# Altium PCB FVA-NET.PcbDoc
Units mm, origin at the board's own origin, x right, y up, seen from the top; angles counter-clockwise.
Board outline 40 x 50 mm, 2 copper layers (Top Layer, Bottom Layer); 36 components, 28 nets, 141 pads, 82 vias.
Unrouted connection lines stored in the file: 1.
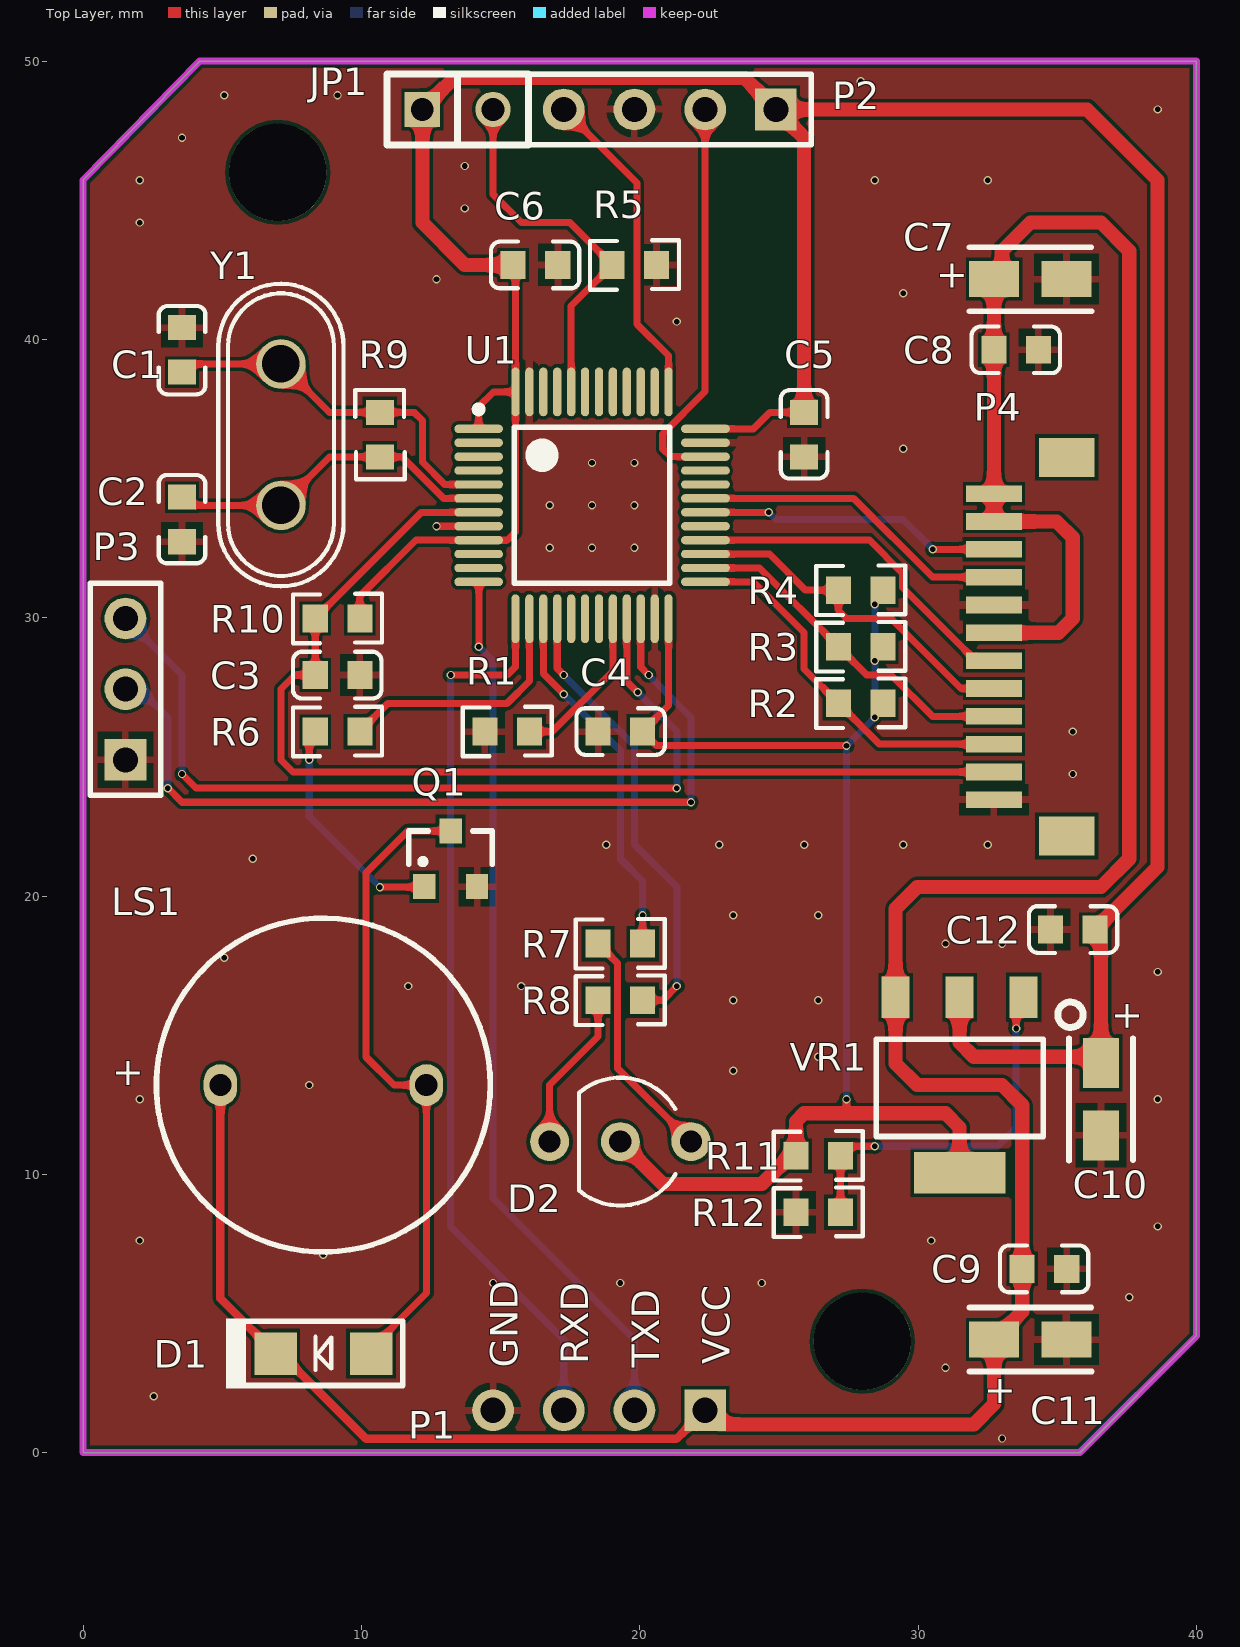
[diagram p0: Top Layer view]
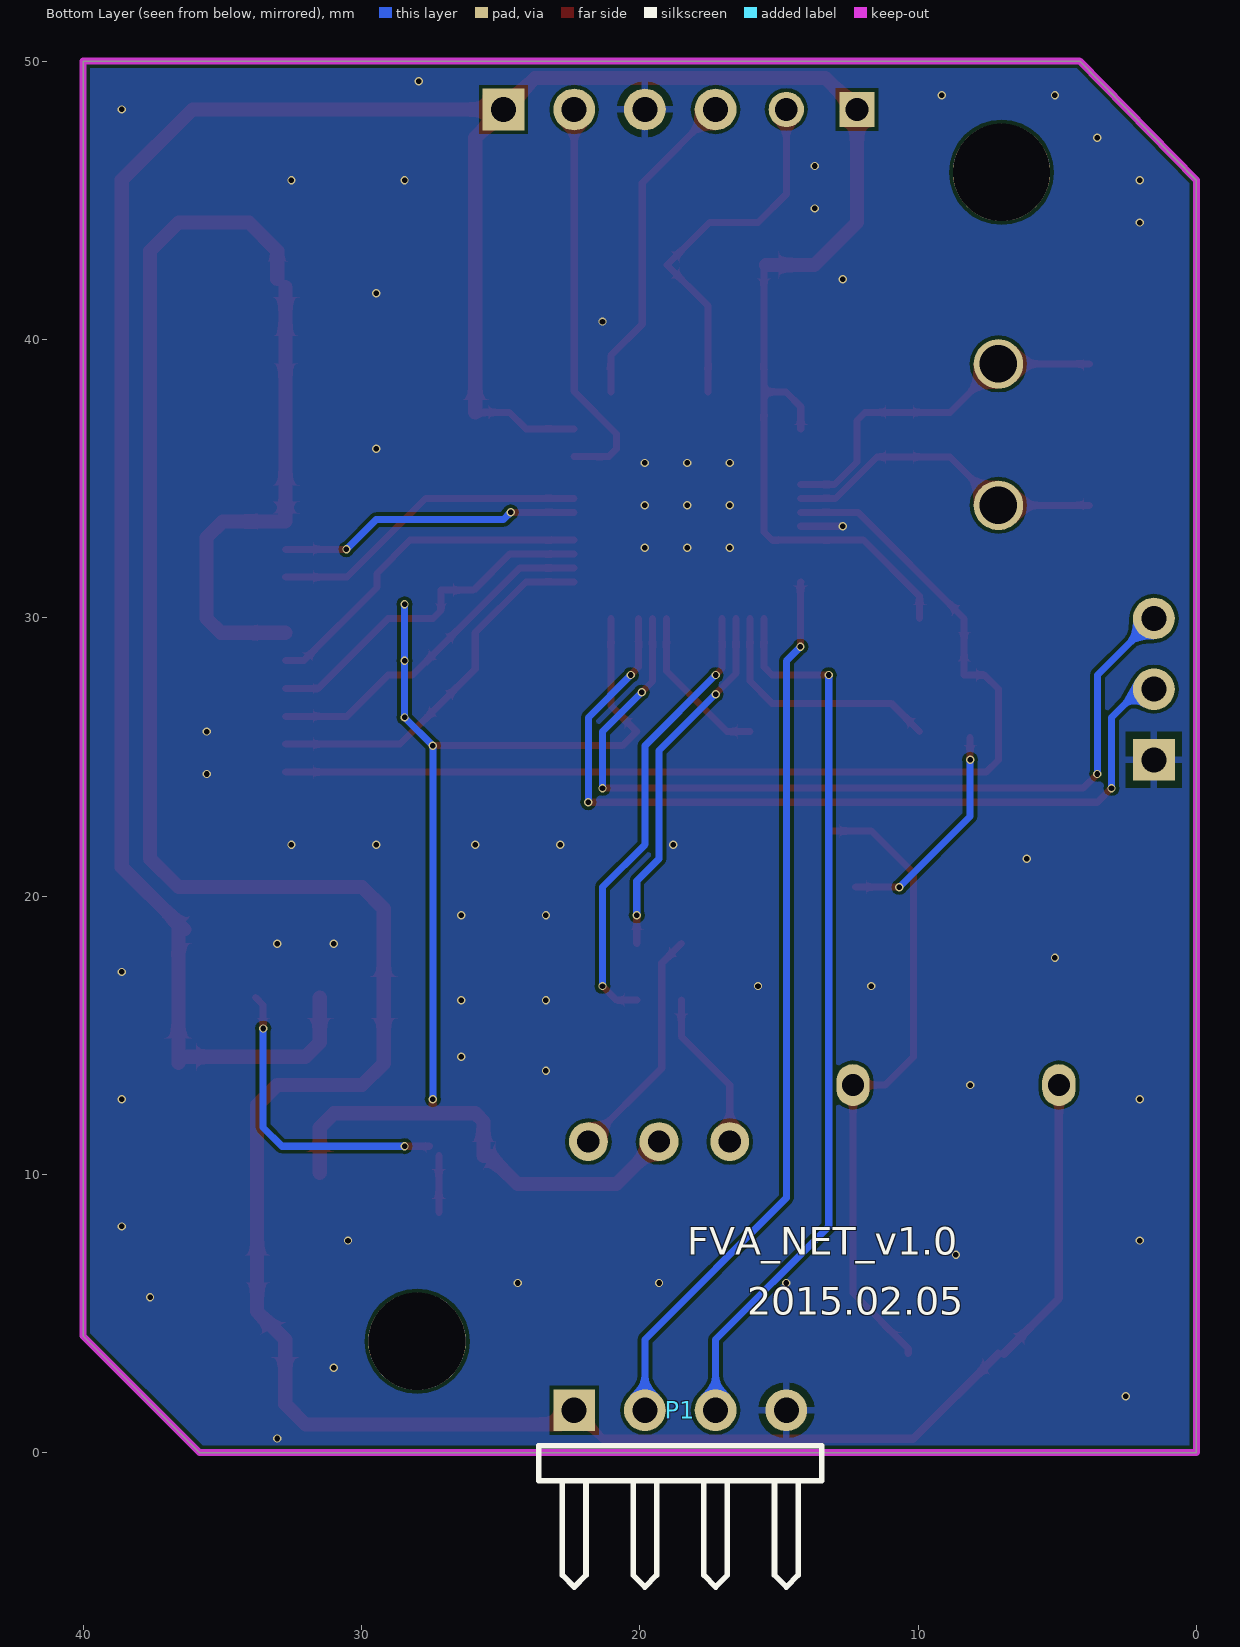
[diagram p1: Bottom Layer view, seen from below]
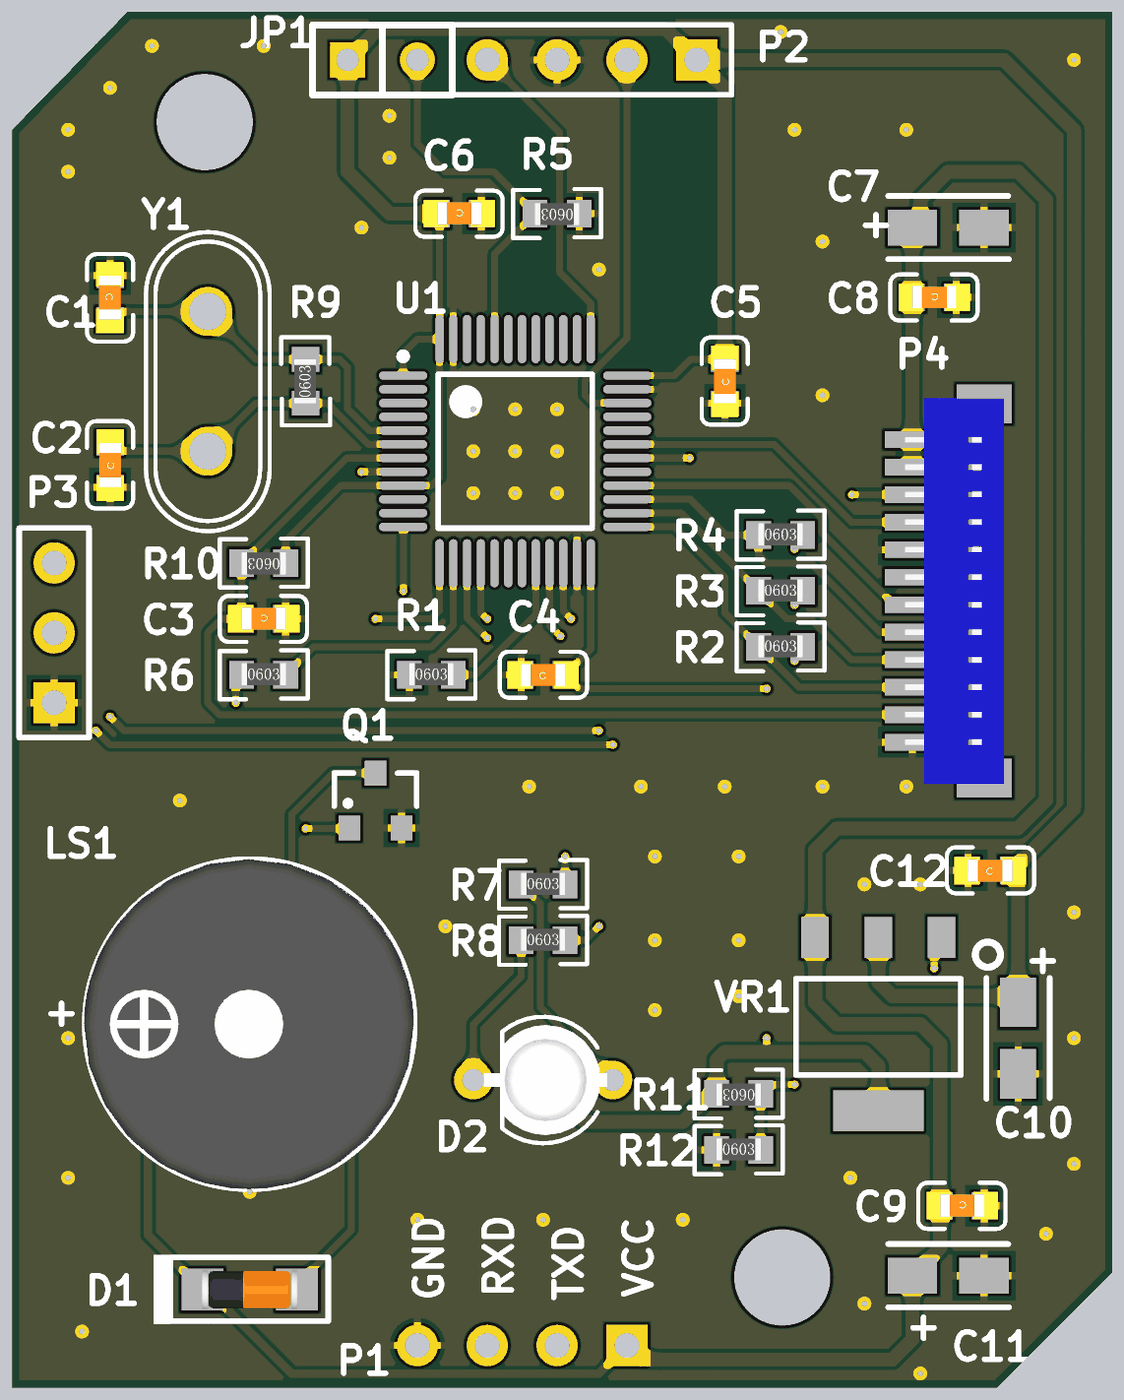
[diagram p2: 3D render of the assembled board from above, using the file's embedded part models]

## Layer stack, top to bottom
Top Solder: solder mask 0.0102, Solder Resist, Dk 3.5
Top Layer: signal copper 0.0356
Dielectric1: dielectric 0.32, FR-4, Dk 4.8
Bottom Layer: signal copper 0.0356
Bottom Solder: solder mask 0.0102, Solder Resist, Dk 3.5

## Board outline
0,0 0,45.72 4.191,50 40,50 40,4.186 35.814,0

## Design rules (kind name [scope] priority, off if disabled: settings)
Clearance [All] p1: gap=0.127
ComponentClearance [All] p1: gap=0 collisioncheckmode=3 verticalgap=0 showdistances=FALSE
FabricationTestPointUsage TestPointUsage [All] p1: valid=0 allowmultiple=FALSE
FabricationTestpoint Testpoint [(IsPad And (OnTopLayer Or OnBottomLayer))] p1: side=3 testpointundercomponent=TRUE minsize=1.016 maxsize=2.54 preferedsize=1.524 minholesize=0 maxholesize=1.016 preferedholesize=0.813 testpointgrid=0.025 allowsidetop=TRUE allowsidebottom=TRUE usegrid=TRUE gridtolerance=0
MinimumSolderMaskSliver [All] p1: minsoldermaskwidth=0
PolygonConnect [All] p1: connectstyle=Relief reliefconductorwidth=0.254 reliefentries=4 polygonreliefangle="90 Angle" airgapwidth=0.254
RoutingVias [All] p1: holewidth=0.3 width=0.6 viastyle="Through Hole" minholewidth=0.3 minwidth=0.6 maxholewidth=0.3 maxwidth=0.6
SilkToSilkClearance [All] p1: silktosilkclearance=0
SilkToSolderMaskClearance SilkscreenOverComponentPads [IsPad] p1: minsilkscreentomaskgap=0 clearancetoexposedcopper=TRUE
SolderMaskExpansion [All] p1: expansion=0.102
UnpouredPolygon [All] p1: allowunpoured=FALSE
Width Width_1 [(InNet('+3.3V') OR InNet('+5V'))] p1: maxlimit=0.508 minlimit=0.254 preferedwidth=0.508
Width [All] p2: maxlimit=0.254 minlimit=0.254 preferedwidth=0.254
23 further rules are at their usual default settings.

## Components (designator, comment, footprint, x,y, rotation, side; value= is the part's Value field where it differs from the comment)
C1 "Cap" c0603 3.556,39.624 r270 top
C2 "Cap" c0603 3.556,33.528 r90 top
C3 "Cap" c0603 9.144,27.94 r180 top
C4 "Cap" c0603 19.304,25.908 r0 top
C5 "Cap" c0603 25.908,36.576 r90 top
C6 "Cap" c0603 16.256,42.672 r180 top
C7 "CAP+" T3216 34.036,42.164 r0 top
C8 "CAP" C0603 33.528,39.624 r180 top
C9 "cap" C0603 34.544,6.604 r180 top
C10 "Cap Pol1" T3216 36.576,12.7 r270 top
C11 "CAP+" T3216 34.036,4.064 r0 top
C12 "cap" C0603 35.56,18.796 r0 top
D1 "1N4148" D1206 8.636,3.556 r180 top
D2 "LED_R&G_1" LED_R&G 19.304,11.176 r180 top
JP1 "JP" SIP2 12.192,48.26 r0 top
LS1 "Speaker" BUZZER 8.636,13.208 r0 top
P1 "Header 4H" HDR1X4H 22.352,1.524 r180 bottom locked
P2 "SWD" HDR1X4 24.892,48.26 r180 top
P3 "Header 3" HDR1X3 1.524,24.892 r90 top
P4 "JST" "JST BM12B-SRSS-TB" 34.036,28.956 r270 top locked (schematic designator P2)
Q1 "NPN" SOT23/BEC 13.208,21.336 r0 top
R1 "RES" R0603 15.24,25.908 r0 top
R2 "RES" R0603 27.94,26.924 r0 top
R3 "RES" R0603 27.94,28.956 r0 top
R4 "RES" R0603 27.94,30.988 r0 top
R5 "RES" R0603 19.812,42.672 r180 top
R6 "RES" R0603 9.144,25.908 r0 top
R7 "RES" R0603 19.304,18.288 r0 top
R8 "RES" R0603 19.304,16.256 r0 top
R9 "RES" R0603 10.668,36.576 r90 top
R10 "RES" R0603 9.144,29.972 r180 top
R11 "RES" R0603 26.416,10.668 r180 top
R12 "RES" R0603 26.416,8.636 r0 top
U1 "STM32F103CBT6" LQFP48 18.288,34.036 r0 top
VR1 "LM317" SOT223 31.496,13.208 r180 top
Y1 "8MHz" XTAL-HC-49/U-S 7.112,34.036 r90 top

## Footprints (in the part's own frame and the unit in brackets; to place one, negate y for a bottom-side part, rotate by r counter-clockwise, add the part's x,y. Pads: shape width x height; smd on the part's side, far side on the other; paste and mask are expansions set on the pad)
BUZZER [mm]
  oval 1.2x1.5 hole 0.8: 1(-3.7,0) 2(3.7,0)
  silkscreen extent -6,-6 6,6, body extent -6.03,-6 5.97,6, height 9.3
c0603 [mm] "Chip Capacitor, 2-Leads, Body 1.6x0.8mm, IPC Medium Density"
  rect 0.9x1 smd: 1(-0.8,0) 2(0.8,0)
  silkscreen extent -1.57,-0.84 1.6,0.84, body extent -1.3,-0.51 1.3,0.49, height 0.89
C0603 [mm] "Chip Capacitor, 2-Leads, Body 1.6x0.8mm, IPC Medium Density"
  rect 0.9x1 smd: 1(-0.8,0) 2(0.8,0)
  silkscreen extent -1.57,-0.84 1.6,0.84, body extent -1.3,-0.51 1.3,0.49, height 0.89
D1206 [mil]
  rect 60x60 smd: 1(-67.5,0) 2(67.5,0)
  silkscreen extent -112,-50 138,49, body extent -69,-29 69,29, height 56
HDR1X3 [mm] "Connector; Header; 3 Position"
  rect 1.5x1.5 hole 0.9: 1(0,0)
  round 1.5 hole 0.9: 2(2.54,0) 3(5.08,0)
  silkscreen extent -1.27,-1.27 6.35,1.27
HDR1X4 [mm] "Connector; Header; 4 Position"
  rect 1.5x1.5 hole 0.9: 1(0,0)
  round 1.5 hole 0.9: 2(2.54,0) 3(5.08,0) 4(7.62,0)
  silkscreen extent -1.27,-1.27 8.89,1.27
HDR1X4H [mm] "Connector; Header; 4 Position; Right Angle"
  rect 1.5x1.5 hole 0.9: 1(0,0)
  round 1.5 hole 0.9: 2(2.54,0) 3(5.08,0) 4(7.62,0)
  silkscreen extent -1.27,-6.35 8.89,-1.27
"JST BM12B-SRSS-TB" [mm] "BM12B-SRSS-TB"
  rect 1.4x2 smd: 0(-6.8,1.308) 0(6.8,1.308)
  rect 0.6x2 smd: 1(-5.5,-1.308) 2(-4.5,-1.308) 3(-3.5,-1.308) 4(-2.5,-1.308) 5(-1.5,-1.308) 6(-0.5,-1.308) 7(0.5,-1.308) 8(1.5,-1.308) 9(2.5,-1.308) 10(3.5,-1.308) 11(4.5,-1.308) 12(5.5,-1.308)
  body extent -7,-1.57 7,2.03, height 4.25
LED_R&G [mm]
  round 1.4 hole 0.8: 1(-2.54,0) 2(0,0) 3(2.54,0)
  silkscreen extent -1.98,-2.3 1.49,2.3, body extent -2.34,-2 2.16,2, height 12.43
LQFP48 [mm] "TSQFP, 48-Leads, Body 9.2x9.2mm (max), Pitch 0.50mm, IPC Medium Density"
  oval 1.75x0.3 smd: 1(-4.075,2.75) 2(-4.075,2.25) 3(-4.075,1.75) 4(-4.075,1.25) 5(-4.075,0.75) 6(-4.075,0.25) 7(-4.075,-0.25) 8(-4.075,-0.75) 9(-4.075,-1.25) 10(-4.075,-1.75) 11(-4.075,-2.25) 12(-4.075,-2.75) 25(4.075,-2.75) 26(4.075,-2.25) 27(4.075,-1.75) 28(4.075,-1.25) 29(4.075,-0.75) 30(4.075,-0.25) 31(4.075,0.25) 32(4.075,0.75) 33(4.075,1.25) 34(4.075,1.75) 35(4.075,2.25) 36(4.075,2.75)
  oval 0.3x1.75 smd: 13(-2.75,-4.075) 14(-2.25,-4.075) 15(-1.75,-4.075) 16(-1.25,-4.075) 17(-0.75,-4.075) 18(-0.25,-4.075) 19(0.25,-4.075) 20(0.75,-4.075) 21(1.25,-4.075) 22(1.75,-4.075) 23(2.25,-4.075) 24(2.75,-4.075) 37(2.75,4.075) 38(2.25,4.075) 39(1.75,4.075) 40(1.25,4.075) 41(0.75,4.075) 42(0.25,4.075) 43(-0.25,4.075) 44(-0.75,4.075) 45(-1.25,4.075) 46(-1.75,4.075) 47(-2.25,4.075) 48(-2.75,4.075)
  silkscreen extent -4.2,-2.8 2.8,3.57, body extent -3.5,-3.5 3.5,3.5, height 1.6
R0603 [mm]
  rect 0.9x1 smd: 1(-0.8,0) 2(0.8,0)
  silkscreen extent -1.6,-0.89 1.6,0.89, body extent -0.8,-0.38 0.8,0.42, height 0.45
SIP2 [mil]
  rect 50x50 hole 32: 1(0,0)
  round 50 hole 32: 2(100,0)
  silkscreen extent -50,-50 150,50
SOT23/BEC [mm]
  rect 0.8x0.9 smd: B(-0.95,-1) C(0,1) E(0.95,-1)
  silkscreen extent -1.5,-0.2 1.5,1
SOT223 [mm]
  rect 1x1.5 smd: 1(-2.3,-3.15) 2(0,-3.15) 3(2.3,-3.15)
  rect 3.28x1.5 smd: 2(0,3.15)
  silkscreen extent -4.44,-2.98 3,1.85
T3216 [mm] "Molded Capacitor, 2-Leads, Body 3.2x1.6mm, IPC Medium Density"
  rect 1.8x1.3 smd: 1(-1.3,0) 2(1.3,0)
  silkscreen extent -2.18,-1.15 2.21,1.15
XTAL-HC-49/U-S [mil]
  round 70 hole 53: 1(200,0) 2(0,0)
  silkscreen extent -115,-89 314,89

## Part data
C1 C2 C3 C4 C5 C6: "电容器 Capacitor"
C8 C9 C12: "Capacitor"
C10: "Polarized Capacitor (Radial)"
D1: library part "Diode 1N4148", "High Conductance Fast Diode"
JP1: library part JP2
LS1: "Loudspeaker"
P1: "Header, 4-Pin, Right Angle"
P2: library part "Header 4", "Header, 4-Pin"
P3: "Header, 3-Pin"
P4: library part "Header 12", "Header, 12-Pin"
Q1: "NPN Transistor"
U1: library part STM32F103x6x8xB, "48 pin"
VR1: library part "Volt Reg", "Voltage Regulator"
Y1: library part XTAL, "Crystal Oscillator"

## Free pads (board coordinates)
  round 3.5 hole 3.5 unplated: 0(7,46) 1(28,4)

## Via types
v1: diameter 0.3, hole 0.2, Top Layer to Bottom Layer, 82 vias

## Nets (pads, with @x,y where several pads share a name; then routed paths per layer and width w, separated by ;. In a path a pad name is that pad's centre, name@x,y a point inside that pad or via, vN(x,y) a via of type N, cw(c..) or ccw(c..) an arc to the next point about the centre after c; other vN are vias at no path point)
+3.3V: C4.2 C5.2 C6.2 C10.1 C12.2 D2.2 JP1.1 P2.1 R2.2 R3.2 R4.2 R10.1 R11.2 U1.1 U1.9 U1.24 U1.36 U1.48 VR1.2 | length 157.6
  Top Layer w0.254: R10.1 9.944,30.772 11.958,32.786 U1.9 15.246,32.786 15.538,33.078 U1.48 ; U1.1 14.213,37.581 14.743,38.111 U1.48 ; C6.2@15.538,42.59 U1.48 ; U1.24 21.038,26.842 C4.2 20.612,25.4 v1(27.432,25.4) ; U1.36 24.086,36.786 24.676,37.376 C5.2 ; 27.432,12.192 v1(27.432,12.7)
  Top Layer w0.508: C6.2 13.716,42.672 12.192,44.196 JP1.1 13.323,49.391 23.761,49.391 P2.1 ; D2.2 20.828,9.652 24.384,9.652 25.4,10.668 R11.2 25.616,11.9 25.908,12.192 27.432,12.192 30.988,12.192 31.496,11.684 VR1.2@31.496,10.058 ; C5.2 25.908,47.244 P2.1 ; VR1.2@31.496,16.358 31.496,14.732 32.004,14.224 C10.1@36.576,14.224 ; C12.2 C12.2@36.576,19.012 ; C10.1 C10.1@36.576,14.224 ; P2.1 36.068,48.26 38.608,45.72 38.608,21.044 C12.2@36.576,19.012 ; C10.1@36.576,14.224 C12.2@36.576,19.012
  Bottom Layer w0.254: v1(27.432,12.7) v1(27.432,25.4) v1(28.448,26.416) v1(28.448,28.448) v1(28.448,30.48)
+5V: C7.1 C8.2 C9.2 C11.1 D1.2 LS1.1 P1.1 P4.1 P4.2 P4.6 VR1.3 | length 115
  Top Layer w0.305: LS1.1 4.936,5.542 D1.2 ; D1.2@7.112,3.556 10.173,0.495 21.323,0.495 P1.1
  Top Layer w0.508: P1.1 22.86,1.016 32.004,1.016 32.736,1.748 C11.1 33.744,5.072 C9.2 33.744,12.484 33.02,13.208 29.972,13.208 29.196,13.984 VR1.3 29.196,19.544 29.972,20.32 36.576,20.32 37.592,21.336 37.592,43.18 36.576,44.196 34.036,44.196 33.02,43.18 C7.1@33.02,42.164 ; P4.6 35.044,29.456 35.56,29.972 35.56,32.876 34.98,33.456 P4.2 C8.2 C7.1@32.728,41.872
BUSY: P4.7 U1.28 | length 12.5
  Top Layer w0.254: U1.28 28.251,32.786 29.444,31.593 29.444,31.081 32.069,28.456 P4.7
GND: C1.1 C2.1 C3.1 C4.1 C5.1 C6.1 C7.2 C8.1 C9.1 C10.2 C11.2 C12.1 P1.4 P2.3 P3.1 P4.5 P4.12 Q1.E R1.1 R5.1 R12.1 U1.8 U1.23 U1.35 U1.47 | length 1.5
  Top Layer w0.254: v1(12.7,33.286) U1.8
  other v1: 33.02,0.508 2.54,2.032 30.988,3.048 37.592,5.588 14.732,6.096 19.304,6.096 24.384,6.096 8.636,7.112 2.032,7.62 30.48,7.62 38.608,8.128 2.032,12.7 38.608,12.7 8.128,13.208 23.368,13.716 26.416,14.224 23.368,16.256 26.416,16.256 11.684,16.764 15.748,16.764 38.608,17.272 5.08,17.78 30.988,18.288 33.02,18.288 23.368,19.304 26.416,19.304 6.096,21.336 18.796,21.844 22.86,21.844 25.908,21.844 29.464,21.844 32.512,21.844 35.56,24.384 35.56,25.908 16.764,32.512 18.288,32.512 19.812,32.512 16.764,34.036 18.288,34.036 19.812,34.036 16.764,35.56 18.288,35.56 19.812,35.56 29.464,36.068 21.336,40.64 29.464,41.656 12.7,42.164 2.032,44.196 13.716,44.704 2.032,45.72 28.448,45.72 32.512,45.72 13.716,46.228 3.556,47.244 38.608,48.26 5.08,48.768 9.144,48.768 27.94,49.276
LED_G: R7.2 U1.15 | length 13.2
  Top Layer w0.254: U1.15 16.538,27.988 v1(17.272,27.254) ; R7.2 v1(20.104,19.304)
  Bottom Layer w0.254: v1(17.272,27.254) 19.304,25.222 19.304,21.336 20.104,20.536 v1(20.104,19.304)
LED_R: R8.2 U1.16 | length 16.4
  Top Layer w0.254: U1.16 17.038,28.174 v1(17.272,27.94) ; R8.2 20.828,16.256 v1(21.336,16.764)
  Bottom Layer w0.254: v1(17.272,27.94) 19.812,25.4 19.812,21.844 21.336,20.32 v1(21.336,16.764)
NetC1_2: C1.2 R9.2 U1.5 Y1.1 | length 13
  Top Layer w0.254: C1.2@3.848,39.116 Y1.1 8.852,37.376 R9.2 11.9,37.376 12.192,37.084 12.192,35.591 12.997,34.786 U1.5
NetC2_2: C2.2 R9.1 U1.6 Y1.2 | length 11.7
  Top Layer w0.254: C2.2@3.848,34.036 Y1.2 8.852,35.776 R9.1 11.468,35.776 12.958,34.286 U1.6
NetD1_1: D1.1 LS1.2 Q1.C | length 23.3
  Top Layer w0.254: D1.1 10.351,3.746 12.336,5.732 LS1.2 11.176,13.208 10.16,14.224 10.16,20.828 11.668,22.336 Q1.C
NetD2_1: D2.1 R7.1 | length 8.5
  Top Layer w0.254: R7.1 19.208,17.584 19.208,13.812 D2.1
NetD2_3: D2.3 R8.1 | length 5.8
  Top Layer w0.254: D2.3 16.764,13.208 18.504,14.948 R8.1
NetJP1_2: JP1.2 R5.2 U1.44 | length 13.6
  Top Layer w0.254: JP1.2 14.732,45.212 15.748,44.196 17.488,44.196 R5.2 17.538,41.198 U1.44
NetP2_2: P2.2 U1.34 | length 14.5
  Top Layer w0.254: P2.2 22.352,38.129 20.828,36.605 20.828,36.068 21.11,35.786 U1.34
NetP2_4: P2.4 U1.37 | length 11.7
  Top Layer w0.254: P2.4 19.908,45.624 19.908,40.544 21.038,39.414 U1.37
NetQ1_B: Q1.B R6.1 | length 8
  Top Layer w0.254: v1(8.128,24.892) R6.1@8.128,25.692 ; v1(10.668,20.32) Q1.B@12.242,20.32
  Bottom Layer w0.254: v1(8.128,24.892) 8.128,22.86 v1(10.668,20.32)
NetR1_2: R1.2 U1.20 | length 5.8
  Top Layer w0.254: R1.2 16.858,25.908 19.038,28.088 U1.20
NetR11_1: R11.1 R12.2 VR1.1 | length 13.1
  Top Layer w0.254: R12.2 R11.1 ; R11.1@27.558,11.01 v1(28.448,11.01) ; v1(33.528,15.24) 33.528,16.09 VR1.1
  Bottom Layer w0.254: v1(28.448,11.01) 32.854,11.01 33.528,11.684 v1(33.528,15.24)
PASS_DRVER: P4.9 R3.1 U1.26 | length 12.6
  Top Layer w0.254: U1.26 24.31,31.786 R3.1 28.156,27.94 29.036,27.94 30.52,26.456 P4.9
RESET: C3.2 P4.11 R10.2 U1.7 | length 39.3
  Top Layer w0.254: U1.7 12.158,33.786 R10.2 C3.2 7.62,27.94 7.112,27.432 7.112,24.892 7.548,24.456 P4.11
RX3: P3.2 U1.22 | length 30.8
  Top Layer w0.254: v1(3.048,23.876) 3.556,23.368 v1(21.844,23.368) ; U1.22 20.038,28.222 v1(20.32,27.94)
  Bottom Layer w0.254: P3.2 2.032,27.432 3.048,26.416 v1(3.048,23.876) ; v1(20.32,27.94) 21.844,26.416 v1(21.844,23.368)
RXD_H2E: P4.3 U1.30 | length 10.9
  Top Layer w0.254: U1.30 v1(24.634,33.786) ; v1(30.536,32.456) P4.3
  Bottom Layer w0.254: v1(24.634,33.786) 24.892,33.528 29.464,33.528 v1(30.536,32.456)
RXD_POE: P1.2 U1.12 | length 32.1
  Top Layer w0.254: U1.12 14.224,31.275 v1(14.224,28.956)
  Bottom Layer w0.254: v1(14.224,28.956) 14.732,28.448 14.732,9.144 19.812,4.064 P1.2
SPEAKER_DRVER: R6.2 U1.14 | length 9.1
  Top Layer w0.254: R6.2 10.96,26.924 15.24,26.924 16.038,27.722 U1.14
TOUCH_OUT1: P4.8 R4.1 U1.27 | length 12.8
  Top Layer w0.254: U1.27 24.666,32.286 25.964,30.988 R4.1 27.14,30.264 27.432,29.972 29.033,29.972 31.549,27.456 P4.8
TOUCH_OUT2: P4.10 R2.1 U1.25 | length 13.5
  Top Layer w0.254: U1.25 24.086,31.286 25.908,29.464 25.908,28.156 R2.1 28.608,25.456 P4.10
TX3: P3.3 U1.21 | length 31.2
  Top Layer w0.254: v1(3.556,24.384) 4.064,23.876 v1(21.336,23.876) ; U1.21 19.538,27.706 v1(19.929,27.315)
  Bottom Layer w0.254: P3.3 3.556,27.94 v1(3.556,24.384) ; v1(19.929,27.315) 21.336,25.908 v1(21.336,23.876)
TXD_H2E: P4.4 U1.31 | length 11.5
  Top Layer w0.254: U1.31 27.69,34.286 30.52,31.456 P4.4
TXD_POE: P1.3 U1.13 | length 32.3
  Top Layer w0.254: v1(13.208,27.94) 15.24,27.94 15.538,28.238 U1.13
  Bottom Layer w0.254: v1(13.208,27.94) 13.208,8.128 17.272,4.064 P1.3
pads on no net: P4.0 U1.2 U1.3 U1.4 U1.10 U1.11 U1.17 U1.18 U1.19 U1.29 U1.32 U1.33 U1.38 U1.39 U1.40 U1.41 U1.42 U1.43 U1.45 U1.46

## Polygon pours and split planes (outlines as drawn)
GND on Bottom Layer "Bottom Layer-No Net" (solid, remove dead copper, pour order 6): 43.18,37.084 43.18,54.356 19.304,54.356 -5.08,54.356 -5.08,23.368 -5.08,-5.08 15.748,-5.08 45.72,-5.08 45.72,16.256
GND on Top Layer "Bottom Layer-No Net" (solid, remove dead copper, pour order 4): 44.196,45.212 44.196,52.832 24.384,52.832 -4.572,52.832 -4.572,21.336 -4.572,-5.08 19.304,-5.08 44.196,-5.08 44.196,30.988

## Keep-outs
Keep-Out Layer:
  the board outline again, w0.254

## Silkscreen, mask and mechanical layers (free items; w line width, h text height)
Top Overlay:
  text "RXD" at 18.161,3.175 h1 r90
  text "VCC" at 23.241,3.175 h1 r90
  text "GND" at 15.621,3.048 h1 r90
  text "TXD" at 20.701,3.048 h1 r90
Bottom Overlay:
  text "FVA_NET_v1.0" at 18.288,7.112 h1
  text "2015.02.05" at 16.129,4.953 h1

## Text inside footprints (layer, text, board x,y; h text height)
C7: Top Overlay "+" at 30.658,41.859 h1
C10: Top Overlay "+" at 37.084,16.256 h1 r270
C11: Top Overlay "+" at 32.385,1.778 h1
LS1: Top Overlay "+" at 1.041,13.195 h1